# Altium PCB nrf24l01_cell(P40).PcbDoc (part 3 of 11)
Units mm, origin at the board's own origin, x right, y up, seen from the top; angles counter-clockwise.
Board outline 136.2 x 112.2 mm, 2 copper layers (TopLayer, BottomLayer); 520 components, 0 nets, 2804 pads, 1040 vias.
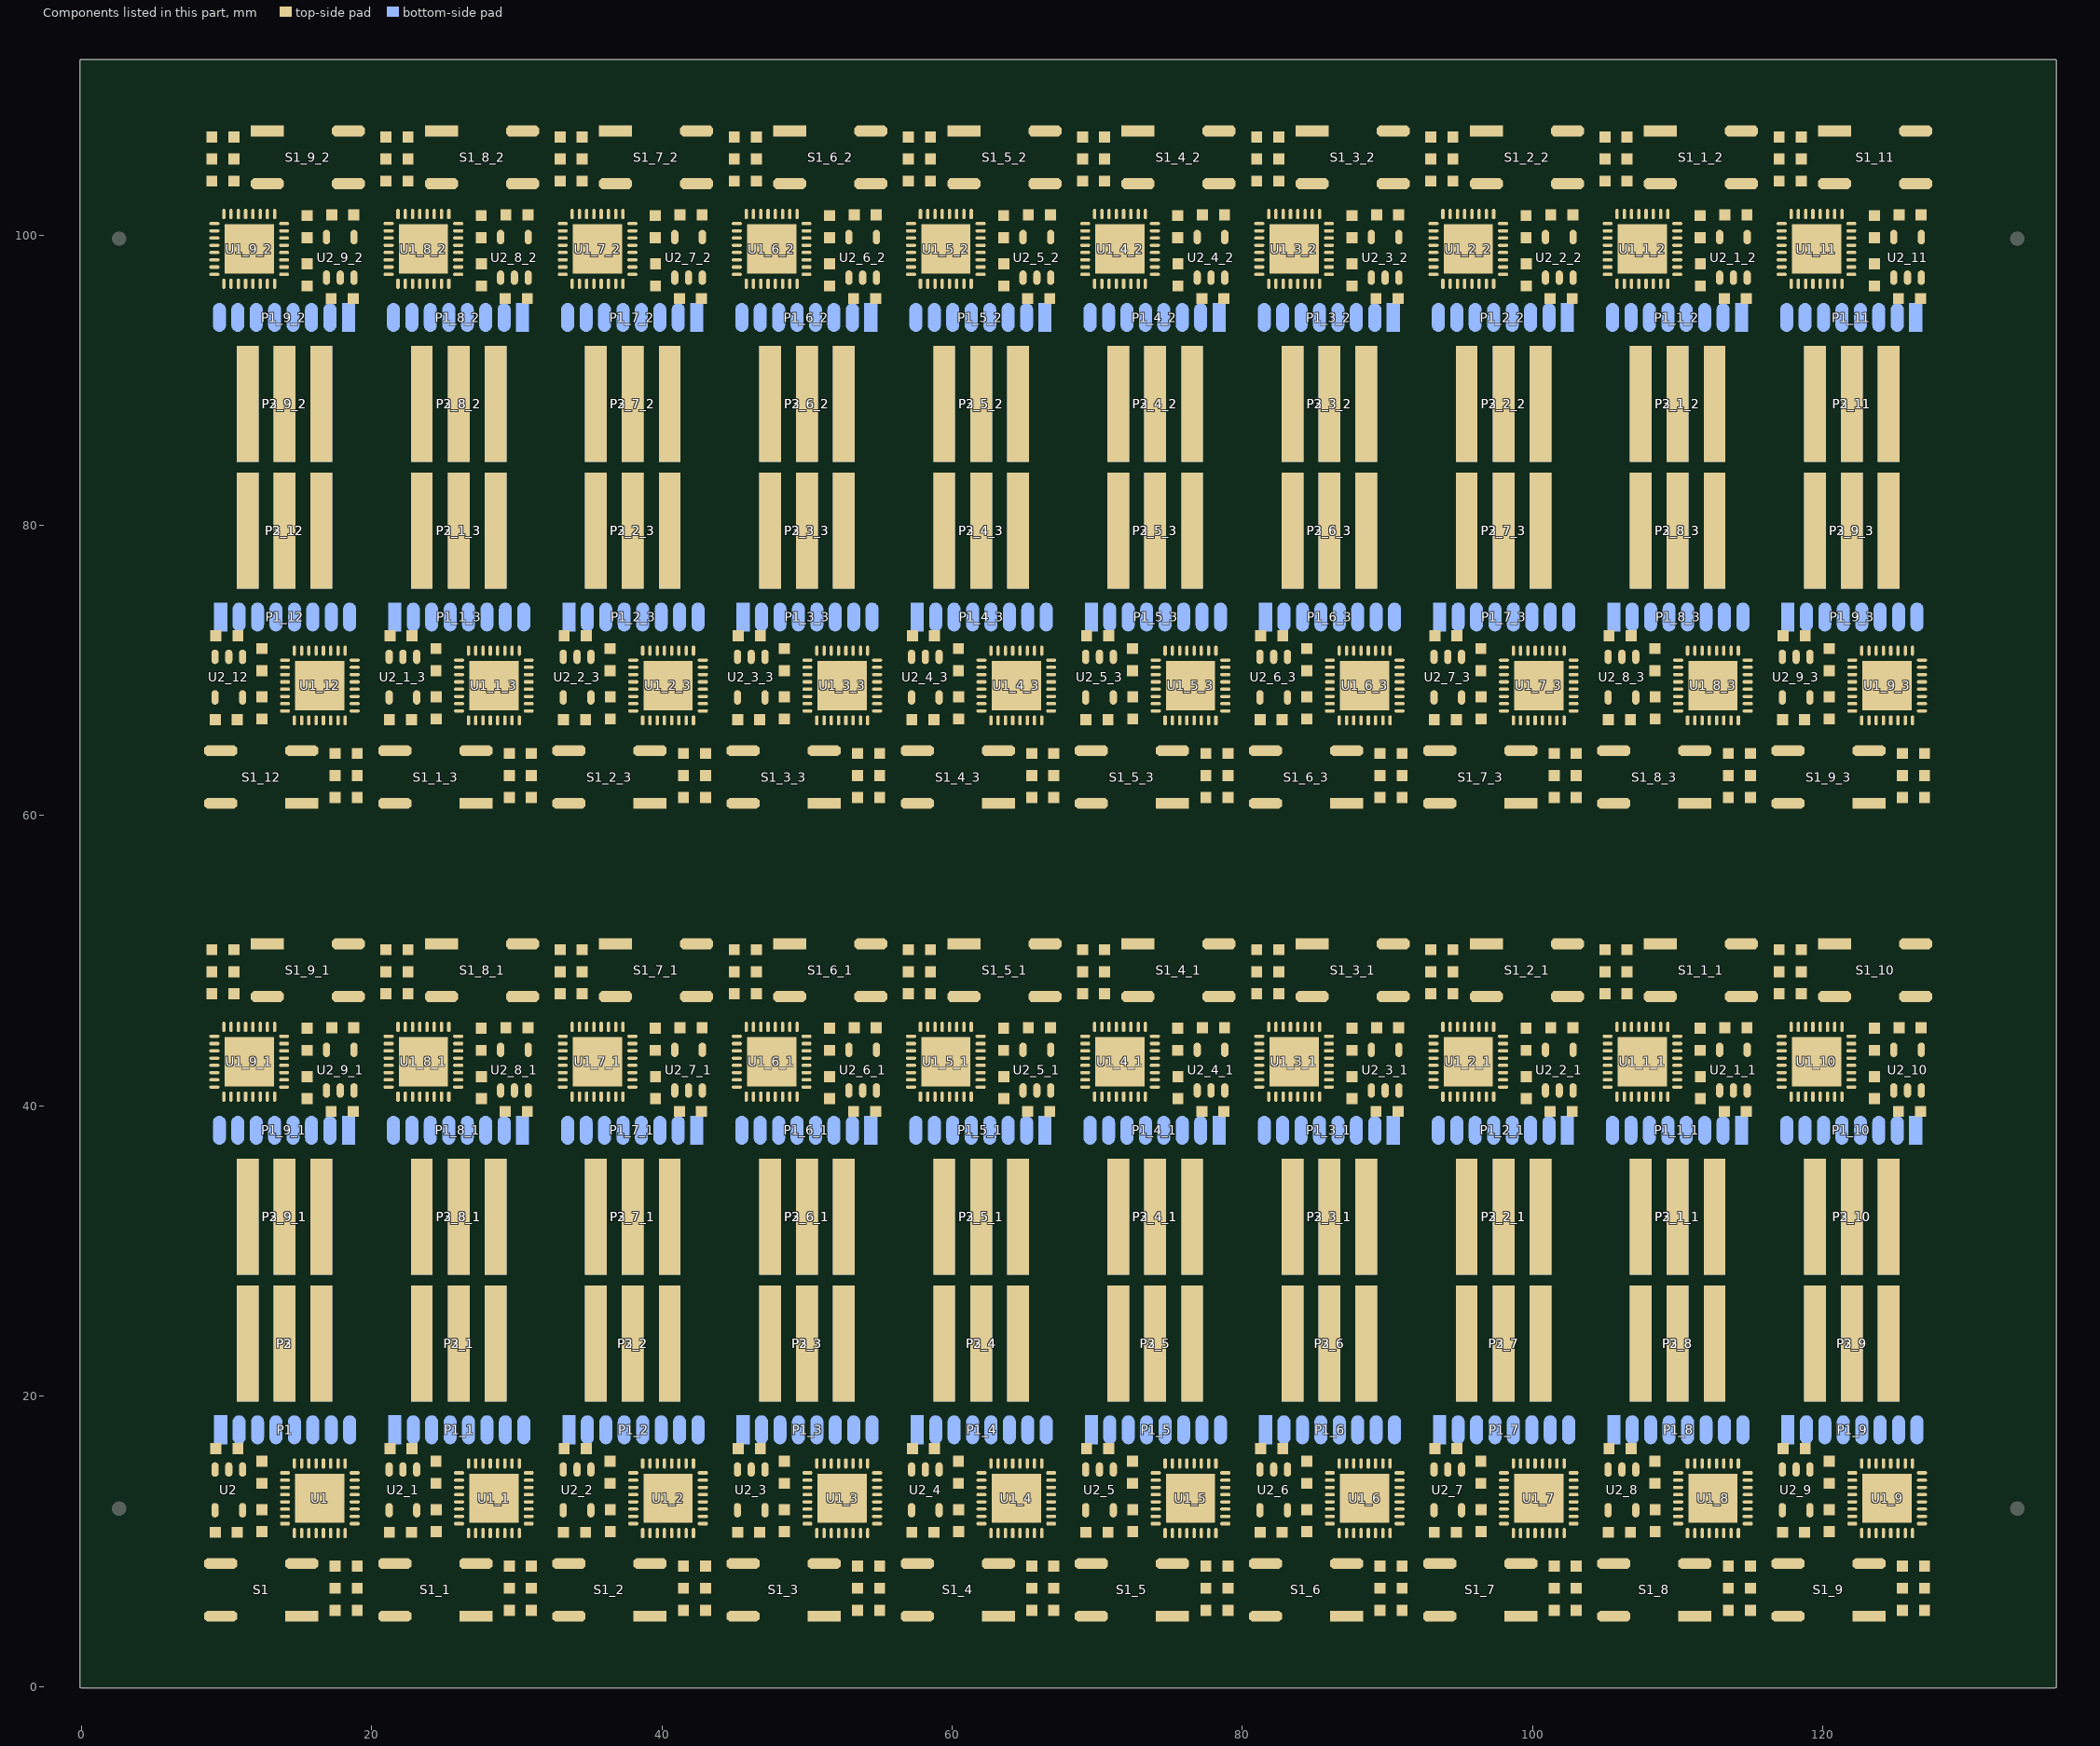
[diagram p3: the components of this part, seen from the top]

## Via types
v1: diameter 0.4, hole 0.2, TopLayer to BottomLayer, tented both sides, 1040 vias

## Nets (pads, with @x,y where several pads share a name; then routed paths per layer and width w, separated by ;. In a path a pad name is that pad's centre, name@x,y a point inside that pad or via, vN(x,y) a via of type N, cw(c..) or ccw(c..) an arc to the next point about the centre after c; other vN are vias at no path point) (continued)
copper on no net: (continued)
  TopLayer w0.203: v1@8.48,43.79 v1(8.55,43.79) 9.17,43.79 ; v1@8.48,99.79 v1(8.55,99.79) 9.17,99.79 ; v1(8.55,38.08) 9.21,38.08 11.46,35.83 ; v1(8.55,94.08) 9.21,94.08 11.46,91.83 ; v1@8.62,38.01 cw(c8.788,37.842) 8.788,38.08 cw(c8.788,38.318) v1@8.62,38.15 ; v1@8.62,43.72 cw(c8.788,43.552) 8.788,43.79 cw(c8.788,44.028) v1@8.62,43.86 ; v1@8.62,94.01 cw(c8.788,93.842) 8.788,94.08 cw(c8.788,94.318) v1@8.62,94.15 ; v1@8.62,99.72 cw(c8.788,99.552) 8.788,99.79 cw(c8.788,100.028) v1@8.62,99.86 ; v1(8.69,17.93) 11.46,20.7 ; v1@8.69,18.028 ccw(c8.69,18.266) 8.858,18.098 ccw(c9.026,17.93) v1@8.788,17.93 ; v1(8.69,73.93) 11.46,76.7 ; v1@8.69,74.028 ccw(c8.69,74.266) 8.858,74.098 ccw(c9.026,73.93) v1@8.788,73.93 ; 8.792,47.522 cw(c8.315,47.045) 8.99,47.045 cw(c9.665,47.045) 9.188,47.522 ; 8.792,103.522 cw(c8.315,103.045) 8.99,103.045 cw(c9.665,103.045) 9.188,103.522 ; 8.99,45.924 cw(c9.296,45.924) v1@9.08,46.14 ; 8.99,46.496 ccw(c9.296,46.496) v1@9.08,46.28 ; 8.99,47.72 8.99,45.66 9.17,45.48 9.17,44.79 ; 8.99,101.924 cw(c9.296,101.924) v1@9.08,102.14 ; 8.99,102.496 ccw(c9.296,102.496) v1@9.08,102.28 ; 8.99,103.72 8.99,101.66 9.17,101.48 9.17,100.79 ; 9.068,16.182 cw(c8.591,15.705) 9.266,15.705 cw(c9.941,15.705) 9.464,16.182 ; 9.068,16.578 ccw(c8.591,17.055) 9.266,17.055 ccw(c9.941,17.055) 9.464,16.578 ; 9.068,72.182 cw(c8.591,71.705) 9.266,71.705 cw(c9.941,71.705) 9.464,72.182 ; 9.068,72.578 ccw(c8.591,73.055) 9.266,73.055 ccw(c9.941,73.055) 9.464,72.578 ; 9.105,14.585 cw(c8.852,14.332) 9.21,14.332 cw(c9.568,14.332) 9.315,14.585 ; 9.105,15.295 ccw(c8.717,15.683) 9.266,15.683 ; 9.105,70.585 cw(c8.852,70.332) 9.21,70.332 cw(c9.568,70.332) 9.315,70.585 ; 9.105,71.295 ccw(c8.717,71.683) 9.266,71.683 ; 9.17,41.29 9.17,39.497 11.52,37.146 12.488,37.146 12.96,36.675 15.165,36.675 v1(15.21,36.63) ; 9.17,41.79 8.69,41.79 8.48,41.58 8.48,39.612 11.352,36.74 12.32,36.74 14,35.06 14,32.37 ; 9.17,97.29 9.17,95.497 11.52,93.146 12.488,93.146 12.96,92.675 15.165,92.675 v1(15.21,92.63) ; 9.17,97.79 8.69,97.79 8.48,97.58 8.48,95.612 11.352,92.74 12.32,92.74 14,91.06 14,88.37 ; 9.807,19.047 cw(c11.46,17.394) 11.46,19.732 ; 9.807,75.047 cw(c11.46,73.394) 11.46,75.732 ; 9.82,40.64 9.82,39.421 11.689,37.553 15.09,37.553 15.283,37.36 v1@15.81,37.36 ; 9.82,96.64 9.82,95.421 11.689,93.553 15.09,93.553 15.283,93.36 v1@15.81,93.36 ; 10.154,19.394 cw(c11.46,18.087) 11.46,19.935 ; 10.154,75.394 cw(c11.46,74.087) 11.46,75.935 ; 10.205,37.085 cw(c8.739,35.62) 10.812,35.62 ; 10.205,93.085 cw(c8.739,91.62) 10.812,91.62 ; 10.231,49.24 cw(c9.556,49.24) 10.033,48.763 cw(c10.51,48.286) 10.51,48.961 ; 10.231,105.24 cw(c9.556,105.24) 10.033,104.763 cw(c10.51,104.286) 10.51,104.961 ; 10.32,40.64 10.32,39.496 11.841,37.975 13.995,37.975 14.08,38.06 v1(14.57,38.06) ; 10.32,45.44 10.32,46.31 9.79,46.84 9.79,48.52 10.51,49.24 ; 10.32,96.64 10.32,95.496 11.841,93.975 13.995,93.975 14.08,94.06 v1(14.57,94.06) ; 10.32,101.44 10.32,102.31 9.79,102.84 9.79,104.52 10.51,105.24 ; 10.501,19.741 cw(c11.46,18.781) 11.46,20.138 ; 10.501,75.741 cw(c11.46,74.781) 11.46,76.138 ; 10.514,47.72 12.62,47.72 ; 10.514,103.72 12.62,103.72 ; 10.552,36.738 cw(c9.433,35.62) 11.015,35.62 ; 10.552,92.738 cw(c9.433,91.62) 11.015,91.62 ; 10.579,19.819 ccw(c10.019,20.38) 10.812,20.38 ; 10.579,75.819 ccw(c10.019,76.38) 10.812,76.38 ; 10.659,10.884 ccw(c10.443,11.516) 11.11,11.516 ; 10.659,66.884 ccw(c10.443,67.516) 11.11,67.516 ; 10.712,36.578 ccw(c11.46,37.327) 11.46,36.268 ; 10.712,47.522 cw(c11.189,47.045) 11.189,47.72 cw(c11.189,48.395) 10.712,47.918 ; 10.712,92.578 ccw(c11.46,93.327) 11.46,92.268 ; 10.712,103.522 cw(c11.189,103.045) 11.189,103.72 cw(c11.189,104.395) 10.712,103.918 ; 10.725,10.692 ccw(c10.54,11.231) 11.11,11.231 ; 10.725,66.692 ccw(c10.54,67.231) 11.11,67.231 ; 10.75,10.62 11.11,10.98 11.11,11.44 ; 10.75,66.62 11.11,66.98 11.11,67.44 ; 10.791,10.5 ccw(c10.638,10.946) 11.11,10.946 ; 10.791,66.5 ccw(c10.638,66.946) 11.11,66.946 ; 10.82,40.64 10.82,39.71 v1(12.05,38.48) ; 10.82,96.64 10.82,95.71 v1(12.05,94.48) ; v1@10.86,18.532 cw(c10.86,18.294) 11.028,18.462 cw(c11.196,18.63) v1@10.958,18.63 ; v1(10.86,18.63) 12.07,17.42 14.076,17.42 14.481,17.015 15.09,17.015 16.18,15.925 16.18,15.36 ; v1@10.86,74.532 cw(c10.86,74.294) 11.028,74.462 cw(c11.196,74.63) v1@10.958,74.63 ; v1(10.86,74.63) 12.07,73.42 14.076,73.42 14.481,73.015 15.09,73.015 16.18,71.925 16.18,71.36 ; 10.898,36.392 cw(c10.127,35.62) 11.218,35.62 ; 10.898,92.392 cw(c10.127,91.62) 11.218,91.62 ; 10.916,47.72 cw(c10.916,46.398) 11.85,47.333 ; 10.916,103.72 cw(c10.916,102.398) 11.85,103.333 ; 11.005,11.785 cw(c10.752,11.532) 11.11,11.532 cw(c11.468,11.532) 11.215,11.785 ; 11.005,14.585 cw(c10.752,14.332) 11.11,14.332 cw(c11.468,14.332) 11.215,14.585 ; 11.005,67.785 cw(c10.752,67.532) 11.11,67.532 cw(c11.468,67.532) 11.215,67.785 ; 11.005,70.585 cw(c10.752,70.332) 11.11,70.332 cw(c11.468,70.332) 11.215,70.585 ; 11.11,12.14 11.11,11.44 ; 11.11,14.94 11.11,14.14 10.94,13.97 9.4,13.97 9.21,14.16 9.21,14.94 9.266,14.996 9.266,16.38 9.266,17.75 10.578,19.062 10.656,19.14 v1(11.46,19.14) ; 11.11,68.14 11.11,67.44 ; 11.11,70.94 11.11,70.14 10.94,69.97 9.4,69.97 9.21,70.16 9.21,70.94 9.266,70.996 9.266,72.38 9.266,73.75 10.578,75.062 10.656,75.14 v1(11.46,75.14) ; 11.32,40.64 11.32,40 12.335,38.985 12.84,38.48 v1(13.31,38.48) ; 11.32,96.64 11.32,96 12.335,94.985 12.84,94.48 v1(13.31,94.48) ; v1@11.39,19.07 ccw(c11.222,18.902) 11.222,19.14 ccw(c11.222,19.378) v1@11.39,19.21 ; v1@11.39,75.07 ccw(c11.222,74.902) 11.222,75.14 ccw(c11.222,75.378) v1@11.39,75.21 ; 11.407,47.72 cw(c11.407,46.889) 11.994,47.477 ; 11.407,103.72 cw(c11.407,102.889) 11.994,103.477 ; 11.82,40.64 11.82,40.075 12.91,38.985 13.519,38.985 13.924,38.58 15.93,38.58 v1(17.14,37.37) ; 11.82,96.64 11.82,96.075 12.91,94.985 13.519,94.985 13.924,94.58 15.93,94.58 v1(17.14,93.37) ; v1@11.952,38.48 ccw(c11.714,38.48) 11.882,38.648 ccw(c12.05,38.816) v1@12.05,38.578 ; v1@11.952,94.48 ccw(c11.714,94.48) 11.882,94.648 ccw(c12.05,94.816) v1@12.05,94.578 ; v1@12.11,18.72 v1@12.19,18.64 ; v1@12.11,74.72 v1@12.19,74.64 ; v1(12.12,18.64) v1@12.19,18.64 ; v1(12.12,74.64) v1@12.19,74.64 ; v1@12.19,18.57 cw(c12.358,18.402) 12.358,18.64 cw(c12.358,18.878) v1@12.19,18.71 ; v1@12.19,74.57 cw(c12.358,74.402) 12.358,74.64 cw(c12.358,74.878) v1@12.19,74.71 ; 12.256,12.381 ccw(c11.81,12.84) 12.45,12.84 ; 12.256,68.381 ccw(c11.81,68.84) 12.45,68.84 ; 12.44,15.41 13.2,16.17 14.786,16.17 15.18,15.776 15.18,15.36 ; 12.44,15.789 ccw(c12.44,16.705) 13.088,16.058 ; 12.44,71.41 13.2,72.17 14.786,72.17 15.18,71.776 15.18,71.36 ; 12.44,71.789 ccw(c12.44,72.705) 13.088,72.058 ; 12.45,12.18 12.45,12.84 ; 12.45,68.18 12.45,68.84 ; 12.644,12.381 cw(c13.09,12.84) 12.45,12.84 ; 12.644,68.381 cw(c13.09,68.84) 12.45,68.84 ; 12.719,15.51 cw(c13.153,15.51) 12.846,15.816 ; 12.719,71.51 cw(c13.153,71.51) 12.846,71.816 ; v1(12.79,19.37) 12.835,19.325 15.04,19.325 15.512,18.854 16.48,18.854 18.83,16.503 18.83,14.71 ; v1(12.79,75.37) 12.835,75.325 15.04,75.325 15.512,74.854 16.48,74.854 18.83,72.503 18.83,70.71 ; 12.82,40.64 12.82,40.224 13.214,39.83 14.8,39.83 15.56,40.59 ; 12.82,96.64 12.82,96.224 13.214,95.83 14.8,95.83 15.56,96.59 ; 12.833,40.405 ccw(c13.302,40.405) 12.971,40.073 ; 12.833,96.405 ccw(c13.302,96.405) 12.971,96.073 ; v1@12.86,19.44 ccw(c13.136,19.716) 13.136,19.325 ; v1@12.86,75.44 ccw(c13.136,75.716) 13.136,75.325 ; v1@13.18,14.01 ccw(c13.012,14.178) 13.25,14.178 ccw(c13.488,14.178) v1@13.32,14.01 ; v1@13.18,70.01 ccw(c13.012,70.178) 13.25,70.178 ccw(c13.488,70.178) v1@13.32,70.01 ; v1@13.195,12.564 cw(c13.545,12.219) 13.545,12.71 ; v1@13.195,68.564 cw(c13.545,68.219) 13.545,68.71 ; v1@13.2,12.42 cw(c13.057,12.277) 13.26,12.277 ; v1@13.2,68.42 cw(c13.057,68.277) 13.26,68.277 ; v1@13.24,38.41 ccw(c13.072,38.242) 13.072,38.48 ccw(c13.072,38.718) v1@13.24,38.55 ; v1@13.24,94.41 ccw(c13.072,94.242) 13.072,94.48 ccw(c13.072,94.718) v1@13.24,94.55 ; v1(13.25,13.94) 13.25,14.55 13.41,14.71 14.03,14.71 ; v1(13.25,69.94) 13.25,70.55 13.41,70.71 14.03,70.71 ; 13.26,12.228 cw(c13.532,12.228) v1@13.34,12.42 ; v1@13.26,12.49 13.26,11.59 13.11,11.44 11.11,11.44 ; v1@13.26,12.53 13.44,12.71 14.03,12.71 ccw(c14.03,11.742) v1@13.34,12.421 ; 13.26,68.228 cw(c13.532,68.228) 13.34,68.42 cw(c14.03,67.742) 14.03,68.71 13.44,68.71 v1@13.26,68.53 ; v1@13.26,68.49 13.26,67.59 13.11,67.44 11.11,67.44 ; v1@13.366,12.512 cw(c13.545,12.555) 13.415,12.685 ; v1@13.366,68.512 cw(c13.545,68.555) 13.415,68.685 ; v1(13.43,17.94) 13.92,17.94 14.005,18.025 16.159,18.025 17.68,16.504 17.68,15.36 ; v1(13.43,73.94) 13.92,73.94 14.005,74.025 16.159,74.025 17.68,72.504 17.68,71.36 ; v1@13.5,17.87 cw(c13.668,17.702) 13.668,17.94 cw(c13.668,18.178) v1@13.5,18.01 ; v1@13.5,73.87 cw(c13.668,73.702) 13.668,73.94 cw(c13.668,74.178) v1@13.5,74.01 ; v1@13.9,45.21 cw(c13.732,45.042) 13.97,45.042 cw(c14.208,45.042) v1@14.04,45.21 ; v1@13.9,101.21 cw(c13.732,101.042) 13.97,101.042 cw(c14.208,101.042) v1@14.04,101.21 ; v1@13.96,10.79 ccw(c13.792,10.958) 14.03,10.958 ccw(c14.268,10.958) v1@14.1,10.79 ; v1@13.96,66.79 ccw(c13.792,66.958) 14.03,66.958 ccw(c14.268,66.958) v1@14.1,66.79 ; 13.97,41.29 14.59,41.29 14.75,41.45 v1(14.75,42.06) ; 13.97,42.79 15.18,42.79 15.55,43.16 ; 13.97,44.79 v1(13.97,45.28) ; 13.97,97.29 14.59,97.29 14.75,97.45 v1(14.75,98.06) ; 13.97,98.79 15.18,98.79 15.55,99.16 ; 13.97,100.79 v1(13.97,101.28) ; 14,23.63 14,20.94 15.68,19.26 16.648,19.26 19.52,16.388 19.52,14.42 19.31,14.21 18.83,14.21 ; 14,79.63 14,76.94 15.68,75.26 16.648,75.26 19.52,72.388 19.52,70.42 19.31,70.21 18.83,70.21 ; v1(14.03,10.72) 14.03,11.21 ; 14.03,13.21 12.82,13.21 12.45,12.84 ; v1(14.03,66.72) 14.03,67.21 ; 14.03,69.21 12.82,69.21 12.45,68.84 ; 14.455,43.29 ccw(c14.455,43.781) v1@14.805,43.436 ; 14.455,99.29 ccw(c14.455,99.781) v1@14.805,99.436 ; v1@14.5,37.99 ccw(c14.332,37.822) 14.332,38.06 ccw(c14.332,38.298) v1@14.5,38.13 ; v1@14.5,93.99 ccw(c14.332,93.822) 14.332,94.06 ccw(c14.332,94.298) v1@14.5,94.13 ; 14.585,43.315 ccw(c14.455,43.445) v1@14.634,43.488 ; 14.585,99.315 ccw(c14.455,99.445) v1@14.634,99.488 ; v1@14.66,43.579 cw(c13.97,44.258) 13.97,43.29 14.56,43.29 v1@14.74,43.47 ; v1@14.66,99.579 cw(c13.97,100.258) 13.97,99.29 14.56,99.29 v1@14.74,99.47 ; v1@14.66,43.58 ccw(c14.468,43.772) 14.74,43.772 ; v1@14.66,99.58 ccw(c14.468,99.772) 14.74,99.772 ; v1@14.68,41.99 cw(c14.512,41.822) 14.75,41.822 cw(c14.988,41.822) v1@14.82,41.99 ; v1@14.68,97.99 cw(c14.512,97.822) 14.75,97.822 cw(c14.988,97.822) v1@14.82,97.99 ; v1(14.69,17.52) 15.16,17.52 15.665,17.015 16.68,16 16.68,15.36 ; v1(14.69,73.52) 15.16,73.52 15.665,73.015 16.68,72 16.68,71.36 ; v1@14.74,43.51 14.74,44.41 14.89,44.56 16.89,44.56 ; 14.74,43.723 ccw(c14.943,43.723) v1@14.8,43.58 ; v1@14.74,99.51 14.74,100.41 14.89,100.56 16.89,100.56 ; 14.74,99.723 ccw(c14.943,99.723) v1@14.8,99.58 ; v1@14.76,17.45 cw(c14.928,17.282) 14.928,17.52 cw(c14.928,17.758) v1@14.76,17.59 ; v1@14.76,73.45 cw(c14.928,73.282) 14.928,73.52 cw(c14.928,73.758) v1@14.76,73.59 ; 14.864,36.675 cw(c14.864,36.284) v1@15.14,36.56 ; 14.864,92.675 cw(c14.864,92.284) v1@15.14,92.56 ; 14.912,39.942 cw(c15.56,39.295) 15.56,40.211 ; 14.912,95.942 cw(c15.56,95.295) 15.56,96.211 ; 15.029,15.927 cw(c14.698,15.595) 15.167,15.595 ; 15.029,71.927 cw(c14.698,71.595) 15.167,71.595 ; 15.154,40.184 ccw(c14.847,40.49) 15.281,40.49 ; 15.154,96.184 ccw(c14.847,96.49) 15.281,96.49 ; 15.356,43.619 cw(c14.91,43.16) 15.55,43.16 ; 15.356,99.619 cw(c14.91,99.16) 15.55,99.16 ; 15.38,8.28 17.486,8.28 ; 15.379,64.28 17.486,64.28 ; 15.55,43.82 15.55,43.16 ; 15.55,99.82 15.55,99.16 ; 15.744,43.619 ccw(c16.19,43.16) 15.55,43.16 ; 15.744,99.619 ccw(c16.19,99.16) 15.55,99.16 ; v1@15.81,37.29 ccw(c15.642,37.122) 15.642,37.36 ccw(c15.642,37.598) v1@15.81,37.43 ; v1@15.81,93.29 ccw(c15.642,93.122) 15.642,93.36 ccw(c15.642,93.598) v1@15.81,93.43 ; v1(15.88,37.36) v1@15.81,37.36 ; v1(15.88,93.36) v1@15.81,93.36 ; v1@15.89,37.28 v1@15.81,37.36 ; v1@15.89,93.28 v1@15.81,93.36 ; v1@15.95,17.422 cw(c15.95,17.184) 16.118,17.352 cw(c16.286,17.52) v1@16.048,17.52 ; v1(15.95,17.52) 17.18,16.29 17.18,15.36 ; v1@15.95,73.422 cw(c15.95,73.184) 16.118,73.352 cw(c16.286,73.52) v1@16.048,73.52 ; v1(15.95,73.52) 17.18,72.29 17.18,71.36 ; 16.006,8.523 ccw(c16.593,9.111) 16.593,8.28 ; 16.006,64.523 ccw(c16.593,65.111) 16.593,64.28 ; 16.15,8.667 ccw(c17.084,9.602) 17.084,8.28 ; 16.15,64.667 ccw(c17.084,65.602) 17.084,64.28 ; 16.54,19.732 cw(c16.54,18.673) 17.288,19.422 ; 16.54,20.17 18.79,17.92 v1(19.45,17.92) ; 16.54,35.3 v1(19.31,38.07) ; 16.54,35.862 ccw(c16.54,37.219) 17.499,36.259 ; 16.54,36.065 ccw(c16.54,37.913) 17.846,36.606 ; 16.54,36.268 ccw(c16.54,38.606) 18.193,36.953 ; v1(16.54,36.86) 17.344,36.86 17.422,36.938 18.734,38.25 18.734,39.62 18.734,41.004 18.79,41.06 18.79,41.84 18.6,42.03 17.06,42.03 16.89,41.86 16.89,41.06 ; 16.54,75.732 cw(c16.54,74.673) 17.288,75.422 ; 16.54,76.17 18.79,73.92 v1(19.45,73.92) ; 16.54,91.3 v1(19.31,94.07) ; 16.54,91.862 ccw(c16.54,93.219) 17.499,92.259 ; 16.54,92.065 ccw(c16.54,93.913) 17.846,92.606 ; 16.54,92.268 ccw(c16.54,94.606) 18.193,92.953 ; v1(16.54,92.86) 17.344,92.86 17.422,92.938 18.734,94.25 18.734,95.62 18.734,97.004 18.79,97.06 18.79,97.84 18.6,98.03 17.06,98.03 16.89,97.86 16.89,97.06 ; v1@16.61,36.79 cw(c16.778,36.622) 16.778,36.86 cw(c16.778,37.098) v1@16.61,36.93 ; v1@16.61,92.79 cw(c16.778,92.622) 16.778,92.86 cw(c16.778,93.098) v1@16.61,92.93 ; 16.782,20.38 ccw(c17.873,20.38) 17.102,19.608 ; 16.782,76.38 ccw(c17.873,76.38) 17.102,75.608 ; 16.785,41.415 ccw(c16.532,41.668) 16.89,41.668 ccw(c17.248,41.668) 16.995,41.415 ; 16.785,44.215 ccw(c16.532,44.468) 16.89,44.468 ccw(c17.248,44.468) 16.995,44.215 ; 16.785,97.415 ccw(c16.532,97.668) 16.89,97.668 ccw(c17.248,97.668) 16.995,97.415 ; 16.785,100.215 ccw(c16.532,100.468) 16.89,100.468 ccw(c17.248,100.468) 16.995,100.215 ; 16.89,43.86 16.89,44.56 ; 16.89,44.484 cw(c17.557,44.484) 17.341,45.116 ; 16.89,44.769 cw(c17.46,44.769) 17.275,45.308 ; 16.89,45.054 cw(c17.362,45.054) 17.209,45.5 ; 16.89,99.86 16.89,100.56 ; 16.89,100.484 cw(c17.557,100.484) 17.341,101.116 ; 16.89,100.769 cw(c17.46,100.769) 17.275,101.308 ; 16.89,101.054 cw(c17.362,101.054) 17.209,101.5 ; 16.985,20.38 ccw(c18.567,20.38) 17.448,19.262 ; 16.985,76.38 ccw(c18.567,76.38) 17.448,75.262 ; v1@17.042,37.37 ccw(c16.804,37.37) 16.972,37.538 ccw(c17.14,37.706) v1@17.14,37.468 ; v1@17.042,93.37 ccw(c16.804,93.37) 16.972,93.538 ccw(c17.14,93.706) v1@17.14,93.468 ; 17.188,20.38 ccw(c19.261,20.38) 17.795,18.915 ; 17.188,35.62 cw(c17.981,35.62) 17.421,36.181 ; 17.188,76.38 ccw(c19.261,76.38) 17.795,74.915 ; 17.188,91.62 cw(c17.981,91.62) 17.421,92.181 ; 17.25,45.38 16.89,45.02 16.89,44.56 ; 17.25,101.38 16.89,101.02 16.89,100.56 ; 17.288,8.082 ccw(c16.811,7.605) 16.811,8.28 ccw(c16.811,8.955) 17.288,8.478 ; 17.288,64.082 ccw(c16.811,63.605) 16.811,64.28 ccw(c16.811,64.955) 17.288,64.478 ; 17.49,6.76 18.21,7.48 18.21,9.16 17.68,9.69 17.68,10.56 ; 17.49,7.039 ccw(c17.49,7.714) 17.967,7.237 ccw(c18.444,6.76) 17.769,6.76 ; 17.49,62.76 18.21,63.48 18.21,65.16 17.68,65.69 17.68,66.56 ; 17.49,63.039 ccw(c17.49,63.714) 17.967,63.237 ccw(c18.444,62.76) 17.769,62.76 ; 18.18,15.36 18.18,16.579 16.311,18.447 12.91,18.447 12.717,18.64 v1@12.19,18.64 ; 18.18,71.36 18.18,72.579 16.311,74.447 12.91,74.447 12.717,74.64 v1@12.19,74.64 ; 18.536,39.422 cw(c18.059,38.945) 18.734,38.945 cw(c19.409,38.945) 18.932,39.422 ; 18.536,39.818 ccw(c18.059,40.295) 18.734,40.295 ccw(c19.409,40.295) 18.932,39.818 ; 18.536,95.422 cw(c18.059,94.945) 18.734,94.945 cw(c19.409,94.945) 18.932,95.422 ; 18.536,95.818 ccw(c18.059,96.295) 18.734,96.295 ccw(c19.409,96.295) 18.932,95.818 ; 18.685,41.415 ccw(c18.432,41.668) 18.79,41.668 ccw(c19.148,41.668) 18.895,41.415 ; 18.685,97.415 ccw(c18.432,97.668) 18.79,97.668 ccw(c19.148,97.668) 18.895,97.415 ; 18.734,40.317 cw(c19.283,40.317) 18.895,40.705 ; 18.734,96.317 cw(c19.283,96.317) 18.895,96.705 ; 18.812,8.478 ccw(c18.335,8.955) 19.01,8.955 ccw(c19.685,8.955) 19.208,8.478 ; 18.812,64.478 ccw(c18.335,64.955) 19.01,64.955 ccw(c19.685,64.955) 19.208,64.478 ; 18.83,11.21 18.83,10.52 19.01,10.34 19.01,8.28 ; 18.83,12.21 v1(19.45,12.21) v1@19.52,12.21 ; 18.83,67.21 18.83,66.52 19.01,66.34 19.01,64.28 ; 18.83,68.21 v1(19.45,68.21) v1@19.52,68.21 ; v1@18.92,9.72 cw(c18.704,9.504) 19.01,9.504 ; v1@18.92,9.86 ccw(c18.704,10.076) 19.01,10.076 ; v1@18.92,65.72 cw(c18.704,65.504) 19.01,65.504 ; v1@18.92,65.86 ccw(c18.704,66.076) 19.01,66.076 ; v1@19.212,38.07 cw(c18.974,38.07) 19.142,37.902 cw(c19.31,37.734) v1@19.31,37.972 ; v1@19.212,94.07 cw(c18.974,94.07) 19.142,93.902 cw(c19.31,93.734) v1@19.31,93.972 ; v1@19.38,12.14 ccw(c19.212,11.972) 19.212,12.21 ccw(c19.212,12.448) v1@19.38,12.28 ; v1@19.38,17.85 ccw(c19.212,17.682) 19.212,17.92 ccw(c19.212,18.158) v1@19.38,17.99 ; v1@19.38,68.14 ccw(c19.212,67.972) 19.212,68.21 ccw(c19.212,68.448) v1@19.38,68.28 ; v1@19.38,73.85 ccw(c19.212,73.682) 19.212,73.92 ccw(c19.212,74.158) v1@19.38,73.99 ; v1@20.48,43.79 v1(20.55,43.79) 21.17,43.79 ; v1@20.48,99.79 v1(20.55,99.79) 21.17,99.79 ; v1(20.55,38.08) 21.21,38.08 23.46,35.83 ; v1(20.55,94.08) 21.21,94.08 23.46,91.83 ; v1@20.62,38.01 cw(c20.788,37.842) 20.788,38.08 cw(c20.788,38.318) v1@20.62,38.15 ; v1@20.62,43.72 cw(c20.788,43.552) 20.788,43.79 cw(c20.788,44.028) v1@20.62,43.86 ; v1@20.62,94.01 cw(c20.788,93.842) 20.788,94.08 cw(c20.788,94.318) v1@20.62,94.15 ; v1@20.62,99.72 cw(c20.788,99.552) 20.788,99.79 cw(c20.788,100.028) v1@20.62,99.86 ; v1(20.69,17.93) 23.46,20.7 ; v1@20.69,18.028 ccw(c20.69,18.266) 20.858,18.098 ccw(c21.026,17.93) v1@20.788,17.93 ; v1(20.69,73.93) 23.46,76.7 ; v1@20.69,74.028 ccw(c20.69,74.266) 20.858,74.098 ccw(c21.026,73.93) v1@20.788,73.93 ; 20.792,47.522 cw(c20.315,47.045) 20.99,47.045 cw(c21.665,47.045) 21.188,47.522 ; 20.792,103.522 cw(c20.315,103.045) 20.99,103.045 cw(c21.665,103.045) 21.188,103.522 ; 20.99,45.924 cw(c21.296,45.924) v1@21.08,46.14 ; 20.99,46.496 ccw(c21.296,46.496) v1@21.08,46.28 ; 20.99,47.72 20.99,45.66 21.17,45.48 21.17,44.79 ; 20.99,101.924 cw(c21.296,101.924) v1@21.08,102.14 ; 20.99,102.496 ccw(c21.296,102.496) v1@21.08,102.28 ; 20.99,103.72 20.99,101.66 21.17,101.48 21.17,100.79 ; 21.068,16.182 cw(c20.591,15.705) 21.266,15.705 cw(c21.941,15.705) 21.464,16.182 ; 21.068,16.578 ccw(c20.591,17.055) 21.266,17.055 ccw(c21.941,17.055) 21.464,16.578 ; 21.068,72.182 cw(c20.591,71.705) 21.266,71.705 cw(c21.941,71.705) 21.464,72.182 ; 21.068,72.578 ccw(c20.591,73.055) 21.266,73.055 ccw(c21.941,73.055) 21.464,72.578 ; 21.105,14.585 cw(c20.852,14.332) 21.21,14.332 cw(c21.568,14.332) 21.315,14.585 ; 21.105,15.295 ccw(c20.717,15.683) 21.266,15.683 ; 21.105,70.585 cw(c20.852,70.332) 21.21,70.332 cw(c21.568,70.332) 21.315,70.585 ; 21.105,71.295 ccw(c20.717,71.683) 21.266,71.683 ; 21.17,41.29 21.17,39.497 23.52,37.146 24.488,37.146 24.96,36.675 27.165,36.675 v1(27.21,36.63) ; 21.17,41.79 20.69,41.79 20.48,41.58 20.48,39.612 23.352,36.74 24.32,36.74 26,35.06 26,32.37 ; 21.17,97.29 21.17,95.497 23.52,93.146 24.488,93.146 24.96,92.675 27.165,92.675 v1(27.21,92.63) ; 21.17,97.79 20.69,97.79 20.48,97.58 20.48,95.612 23.352,92.74 24.32,92.74 26,91.06 26,88.37 ; 21.807,19.047 cw(c23.46,17.394) 23.46,19.732 ; 21.807,75.047 cw(c23.46,73.394) 23.46,75.732 ; 21.82,40.64 21.82,39.421 23.689,37.553 27.09,37.553 27.283,37.36 v1@27.81,37.36 ; 21.82,96.64 21.82,95.421 23.689,93.553 27.09,93.553 27.283,93.36 v1@27.81,93.36 ; 22.154,19.394 cw(c23.46,18.087) 23.46,19.935 ; 22.154,75.394 cw(c23.46,74.087) 23.46,75.935 ; 22.205,37.085 cw(c20.739,35.62) 22.812,35.62 ; 22.205,93.085 cw(c20.739,91.62) 22.812,91.62 ; 22.231,49.24 cw(c21.556,49.24) 22.033,48.763 cw(c22.51,48.286) 22.51,48.961 ; 22.231,105.24 cw(c21.556,105.24) 22.033,104.763 cw(c22.51,104.286) 22.51,104.961 ; 22.32,40.64 22.32,39.496 23.841,37.975 25.995,37.975 26.08,38.06 v1(26.57,38.06) ; 22.32,45.44 22.32,46.31 21.79,46.84 21.79,48.52 22.51,49.24 ; 22.32,96.64 22.32,95.496 23.841,93.975 25.995,93.975 26.08,94.06 v1(26.57,94.06) ; 22.32,101.44 22.32,102.31 21.79,102.84 21.79,104.52 22.51,105.24 ; 22.501,19.741 cw(c23.46,18.781) 23.46,20.138 ; 22.501,75.741 cw(c23.46,74.781) 23.46,76.138 ; 22.514,47.72 24.62,47.72 ; 22.514,103.72 24.62,103.72 ; 22.552,36.738 cw(c21.433,35.62) 23.015,35.62 ; 22.552,92.738 cw(c21.433,91.62) 23.015,91.62 ; 22.579,19.819 ccw(c22.019,20.38) 22.812,20.38 ; 22.579,75.819 ccw(c22.019,76.38) 22.812,76.38 ; 22.659,10.884 ccw(c22.443,11.516) 23.11,11.516 ; 22.659,66.884 ccw(c22.443,67.516) 23.11,67.516 ; 22.712,36.578 ccw(c23.46,37.327) 23.46,36.268 ; 22.712,47.522 cw(c23.189,47.045) 23.189,47.72 cw(c23.189,48.395) 22.712,47.918 ; 22.712,92.578 ccw(c23.46,93.327) 23.46,92.268 ; 22.712,103.522 cw(c23.189,103.045) 23.189,103.72 cw(c23.189,104.395) 22.712,103.918 ; 22.725,10.692 ccw(c22.54,11.231) 23.11,11.231 ; 22.725,66.692 ccw(c22.54,67.231) 23.11,67.231 ; 22.75,10.62 23.11,10.98 23.11,11.44 ; 22.75,66.62 23.11,66.98 23.11,67.44 ; 22.791,10.5 ccw(c22.638,10.946) 23.11,10.946 ; 22.791,66.5 ccw(c22.638,66.946) 23.11,66.946 ; 22.82,40.64 22.82,39.71 v1(24.05,38.48) ; 22.82,96.64 22.82,95.71 v1(24.05,94.48) ; v1@22.86,18.532 cw(c22.86,18.294) 23.028,18.462 cw(c23.196,18.63) v1@22.958,18.63 ; v1(22.86,18.63) 24.07,17.42 26.076,17.42 26.481,17.015 27.09,17.015 28.18,15.925 28.18,15.36 ; v1@22.86,74.532 cw(c22.86,74.294) 23.028,74.462 cw(c23.196,74.63) v1@22.958,74.63 ; v1(22.86,74.63) 24.07,73.42 26.076,73.42 26.481,73.015 27.09,73.015 28.18,71.925 28.18,71.36 ; 22.898,36.392 cw(c22.127,35.62) 23.218,35.62 ; 22.898,92.392 cw(c22.127,91.62) 23.218,91.62 ; 22.916,47.72 cw(c22.916,46.398) 23.85,47.333 ; 22.916,103.72 cw(c22.916,102.398) 23.85,103.333 ; 23.005,11.785 cw(c22.752,11.532) 23.11,11.532 cw(c23.468,11.532) 23.215,11.785 ; 23.005,14.585 cw(c22.752,14.332) 23.11,14.332 cw(c23.468,14.332) 23.215,14.585 ; 23.005,67.785 cw(c22.752,67.532) 23.11,67.532 cw(c23.468,67.532) 23.215,67.785 ; 23.005,70.585 cw(c22.752,70.332) 23.11,70.332 cw(c23.468,70.332) 23.215,70.585 ; 23.11,12.14 23.11,11.44 ; 23.11,14.94 23.11,14.14 22.94,13.97 21.4,13.97 21.21,14.16 21.21,14.94 21.266,14.996 21.266,16.38 21.266,17.75 22.578,19.062 22.656,19.14 v1(23.46,19.14) ; 23.11,68.14 23.11,67.44 ; 23.11,70.94 23.11,70.14 22.94,69.97 21.4,69.97 21.21,70.16 21.21,70.94 21.266,70.996 21.266,72.38 21.266,73.75 22.578,75.062 22.656,75.14 v1(23.46,75.14) ; 23.32,40.64 23.32,40 24.335,38.985 24.84,38.48 v1(25.31,38.48) ; 23.32,96.64 23.32,96 24.335,94.985 24.84,94.48 v1(25.31,94.48) ; v1@23.39,19.07 ccw(c23.222,18.902) 23.222,19.14 ccw(c23.222,19.378) v1@23.39,19.21 ; v1@23.39,75.07 ccw(c23.222,74.902) 23.222,75.14 ccw(c23.222,75.378) v1@23.39,75.21 ; 23.407,47.72 cw(c23.407,46.889) 23.994,47.477 ; 23.407,103.72 cw(c23.407,102.889) 23.994,103.477 ; 23.82,40.64 23.82,40.075 24.91,38.985 25.519,38.985 25.924,38.58 27.93,38.58 v1(29.14,37.37) ; 23.82,96.64 23.82,96.075 24.91,94.985 25.519,94.985 25.924,94.58 27.93,94.58 v1(29.14,93.37) ; v1@23.952,38.48 ccw(c23.714,38.48) 23.882,38.648 ccw(c24.05,38.816) v1@24.05,38.578 ; v1@23.952,94.48 ccw(c23.714,94.48) 23.882,94.648 ccw(c24.05,94.816) v1@24.05,94.578 ; v1@24.11,18.72 v1@24.19,18.64 ; v1@24.11,74.72 v1@24.19,74.64 ; v1(24.12,18.64) v1@24.19,18.64 ; v1(24.12,74.64) v1@24.19,74.64 ; v1@24.19,18.57 cw(c24.358,18.402) 24.358,18.64 cw(c24.358,18.878) v1@24.19,18.71 ; v1@24.19,74.57 cw(c24.358,74.402) 24.358,74.64 cw(c24.358,74.878) v1@24.19,74.71 ; 24.256,12.381 ccw(c23.81,12.84) 24.45,12.84 ; 24.256,68.381 ccw(c23.81,68.84) 24.45,68.84 ; 24.44,15.41 25.2,16.17 26.786,16.17 27.18,15.776 27.18,15.36 ; 24.44,15.789 ccw(c24.44,16.705) 25.088,16.058 ; 24.44,71.41 25.2,72.17 26.786,72.17 27.18,71.776 27.18,71.36 ; 24.44,71.789 ccw(c24.44,72.705) 25.088,72.058 ; 24.45,12.18 24.45,12.84 ; 24.45,68.18 24.45,68.84 ; 24.644,12.381 cw(c25.09,12.84) 24.45,12.84 ; 24.644,68.381 cw(c25.09,68.84) 24.45,68.84 ; 24.719,15.51 cw(c25.153,15.51) 24.846,15.816 ; 24.719,71.51 cw(c25.153,71.51) 24.846,71.816 ; v1(24.79,19.37) 24.835,19.325 27.04,19.325 27.512,18.854 28.48,18.854 30.83,16.503 30.83,14.71 ; v1(24.79,75.37) 24.835,75.325 27.04,75.325 27.512,74.854 28.48,74.854 30.83,72.503 30.83,70.71 ; 24.82,40.64 24.82,40.224 25.214,39.83 26.8,39.83 27.56,40.59 ; 24.82,96.64 24.82,96.224 25.214,95.83 26.8,95.83 27.56,96.59 ; 24.833,40.405 ccw(c25.302,40.405) 24.971,40.073 ; 24.833,96.405 ccw(c25.302,96.405) 24.971,96.073 ; v1@24.86,19.44 ccw(c25.136,19.716) 25.136,19.325 ; v1@24.86,75.44 ccw(c25.136,75.716) 25.136,75.325 ; v1@25.18,14.01 ccw(c25.012,14.178) 25.25,14.178 ccw(c25.488,14.178) v1@25.32,14.01 ; v1@25.18,70.01 ccw(c25.012,70.178) 25.25,70.178 ccw(c25.488,70.178) v1@25.32,70.01 ; v1@25.195,12.564 cw(c25.545,12.219) 25.545,12.71 ; v1@25.195,68.564 cw(c25.545,68.219) 25.545,68.71 ; v1@25.2,12.42 cw(c25.057,12.277) 25.26,12.277 ; v1@25.2,68.42 cw(c25.057,68.277) 25.26,68.277 ; v1@25.24,38.41 ccw(c25.072,38.242) 25.072,38.48 ccw(c25.072,38.718) v1@25.24,38.55 ; v1@25.24,94.41 ccw(c25.072,94.242) 25.072,94.48 ccw(c25.072,94.718) v1@25.24,94.55 ; v1(25.25,13.94) 25.25,14.55 25.41,14.71 26.03,14.71 ; v1(25.25,69.94) 25.25,70.55 25.41,70.71 26.03,70.71 ; 25.26,12.228 cw(c25.532,12.228) v1@25.34,12.42 ; v1@25.26,12.49 25.26,11.59 25.11,11.44 23.11,11.44 ; v1@25.26,12.53 25.44,12.71 26.03,12.71 ccw(c26.03,11.742) v1@25.34,12.421 ; 25.26,68.228 cw(c25.532,68.228) v1@25.34,68.42 ; v1@25.26,68.49 25.26,67.59 25.11,67.44 23.11,67.44 ; v1@25.26,68.53 25.44,68.71 26.03,68.71 ccw(c26.03,67.742) v1@25.34,68.421 ; v1@25.366,12.512 cw(c25.545,12.555) 25.415,12.685 ; v1@25.366,68.512 cw(c25.545,68.555) 25.415,68.685 ; v1(25.43,17.94) 25.92,17.94 26.005,18.025 28.159,18.025 29.68,16.504 29.68,15.36 ; v1(25.43,73.94) 25.92,73.94 26.005,74.025 28.159,74.025 29.68,72.504 29.68,71.36 ; v1@25.5,17.87 cw(c25.668,17.702) 25.668,17.94 cw(c25.668,18.178) v1@25.5,18.01 ; v1@25.5,73.87 cw(c25.668,73.702) 25.668,73.94 cw(c25.668,74.178) v1@25.5,74.01 ; v1@25.9,45.21 cw(c25.732,45.042) 25.97,45.042 cw(c26.208,45.042) v1@26.04,45.21 ; v1@25.9,101.21 cw(c25.732,101.042) 25.97,101.042 cw(c26.208,101.042) v1@26.04,101.21 ; v1@25.96,10.79 ccw(c25.792,10.958) 26.03,10.958 ccw(c26.268,10.958) v1@26.1,10.79 ; v1@25.96,66.79 ccw(c25.792,66.958) 26.03,66.958 ccw(c26.268,66.958) v1@26.1,66.79 ; 25.97,41.29 26.59,41.29 26.75,41.45 v1(26.75,42.06) ; 25.97,42.79 27.18,42.79 27.55,43.16 ; 25.97,44.79 v1(25.97,45.28) ; 25.97,97.29 26.59,97.29 26.75,97.45 v1(26.75,98.06) ; 25.97,98.79 27.18,98.79 27.55,99.16 ; 25.97,100.79 v1(25.97,101.28) ; 26,23.63 26,20.94 27.68,19.26 28.648,19.26 31.52,16.388 31.52,14.42 31.31,14.21 30.83,14.21 ; 26,79.63 26,76.94 27.68,75.26 28.648,75.26 31.52,72.388 31.52,70.42 31.31,70.21 30.83,70.21 ; v1(26.03,10.72) 26.03,11.21 ; 26.03,13.21 24.82,13.21 24.45,12.84 ; v1(26.03,66.72) 26.03,67.21 ; 26.03,69.21 24.82,69.21 24.45,68.84 ; 26.455,43.29 ccw(c26.455,43.781) v1@26.805,43.436 ; 26.455,99.29 ccw(c26.455,99.781) v1@26.805,99.436 ; v1@26.5,37.99 ccw(c26.332,37.822) 26.332,38.06 ccw(c26.332,38.298) v1@26.5,38.13 ; v1@26.5,93.99 ccw(c26.332,93.822) 26.332,94.06 ccw(c26.332,94.298) v1@26.5,94.13 ; 26.585,43.315 ccw(c26.455,43.445) v1@26.634,43.488 ; 26.585,99.315 ccw(c26.455,99.445) v1@26.634,99.488 ; v1@26.66,99.579 cw(c25.97,100.258) 25.97,99.29 26.56,99.29 v1@26.74,99.47 ; v1@26.66,99.58 ccw(c26.468,99.772) 26.74,99.772 ; v1@26.68,41.99 cw(c26.512,41.822) 26.75,41.822 cw(c26.988,41.822) v1@26.82,41.99 ; v1@26.68,97.99 cw(c26.512,97.822) 26.75,97.822 cw(c26.988,97.822) v1@26.82,97.99 ; v1(26.69,17.52) 27.16,17.52 27.665,17.015 28.68,16 28.68,15.36 ; v1(26.69,73.52) 27.16,73.52 27.665,73.015 28.68,72 28.68,71.36 ; v1@26.74,43.47 26.56,43.29 25.97,43.29 ccw(c25.97,44.258) 26.66,43.579 ccw(c26.468,43.772) 26.74,43.772 ; v1@26.74,43.51 26.74,44.41 26.89,44.56 28.89,44.56 ; 26.74,43.723 ccw(c26.943,43.723) v1@26.8,43.58 ; v1@26.74,99.51 26.74,100.41 26.89,100.56 28.89,100.56 ; 26.74,99.723 ccw(c26.943,99.723) v1@26.8,99.58 ; v1@26.76,17.45 cw(c26.928,17.282) 26.928,17.52 cw(c26.928,17.758) v1@26.76,17.59 ; v1@26.76,73.45 cw(c26.928,73.282) 26.928,73.52 cw(c26.928,73.758) v1@26.76,73.59 ; 26.864,36.675 cw(c26.864,36.284) v1@27.14,36.56 ; 26.864,92.675 cw(c26.864,92.284) v1@27.14,92.56 ; 26.912,39.942 cw(c27.56,39.295) 27.56,40.211 ; 26.912,95.942 cw(c27.56,95.295) 27.56,96.211 ; 27.029,15.927 cw(c26.698,15.595) 27.167,15.595 ; 27.029,71.927 cw(c26.698,71.595) 27.167,71.595 ; 27.154,40.184 ccw(c26.847,40.49) 27.281,40.49 ; 27.154,96.184 ccw(c26.847,96.49) 27.281,96.49 ; 27.356,43.619 cw(c26.91,43.16) 27.55,43.16 ; 27.356,99.619 cw(c26.91,99.16) 27.55,99.16 ; 27.38,8.28 29.486,8.28 ; 27.379,64.28 29.486,64.28 ; 27.55,43.82 27.55,43.16 ; 27.55,99.82 27.55,99.16 ; 27.744,43.619 ccw(c28.19,43.16) 27.55,43.16 ; 27.744,99.619 ccw(c28.19,99.16) 27.55,99.16 ; v1@27.81,37.29 ccw(c27.642,37.122) 27.642,37.36 ccw(c27.642,37.598) v1@27.81,37.43 ; v1@27.81,93.29 ccw(c27.642,93.122) 27.642,93.36 ccw(c27.642,93.598) v1@27.81,93.43 ; v1(27.88,37.36) v1@27.81,37.36 ; v1(27.88,93.36) v1@27.81,93.36 ; v1@27.89,37.28 v1@27.81,37.36 ; v1@27.89,93.28 v1@27.81,93.36 ; v1@27.95,17.422 cw(c27.95,17.184) 28.118,17.352 cw(c28.286,17.52) v1@28.048,17.52 ; v1(27.95,17.52) 29.18,16.29 29.18,15.36 ; v1@27.95,73.422 cw(c27.95,73.184) 28.118,73.352 cw(c28.286,73.52) v1@28.048,73.52 ; v1(27.95,73.52) 29.18,72.29 29.18,71.36 ; 28.006,8.523 ccw(c28.593,9.111) 28.593,8.28 ; 28.006,64.523 ccw(c28.593,65.111) 28.593,64.28 ; 28.15,8.667 ccw(c29.084,9.602) 29.084,8.28 ; 28.15,64.667 ccw(c29.084,65.602) 29.084,64.28 ; 28.54,19.732 cw(c28.54,18.673) 29.288,19.422 ; 28.54,20.17 30.79,17.92 v1(31.45,17.92) ; 28.54,35.3 v1(31.31,38.07) ; 28.54,35.862 ccw(c28.54,37.219) 29.499,36.259 ; 28.54,36.065 ccw(c28.54,37.913) 29.846,36.606 ; 28.54,36.268 ccw(c28.54,38.606) 30.193,36.953 ; v1(28.54,36.86) 29.344,36.86 29.422,36.938 30.734,38.25 30.734,39.62 30.734,41.004 30.79,41.06 30.79,41.84 30.6,42.03 29.06,42.03 28.89,41.86 28.89,41.06 ; 28.54,75.732 cw(c28.54,74.673) 29.288,75.422 ; 28.54,76.17 30.79,73.92 v1(31.45,73.92) ; 28.54,91.3 v1(31.31,94.07) ; 28.54,91.862 ccw(c28.54,93.219) 29.499,92.259 ; 28.54,92.065 ccw(c28.54,93.913) 29.846,92.606 ; 28.54,92.268 ccw(c28.54,94.606) 30.193,92.953 ; v1(28.54,92.86) 29.344,92.86 29.422,92.938 30.734,94.25 30.734,95.62 30.734,97.004 30.79,97.06 30.79,97.84 30.6,98.03 29.06,98.03 28.89,97.86 28.89,97.06 ; v1@28.61,36.79 cw(c28.778,36.622) 28.778,36.86 cw(c28.778,37.098) v1@28.61,36.93 ; v1@28.61,92.79 cw(c28.778,92.622) 28.778,92.86 cw(c28.778,93.098) v1@28.61,92.93 ; 28.782,20.38 ccw(c29.873,20.38) 29.102,19.608 ; 28.782,76.38 ccw(c29.873,76.38) 29.102,75.608 ; 28.785,41.415 ccw(c28.532,41.668) 28.89,41.668 ccw(c29.248,41.668) 28.995,41.415 ; 28.785,44.215 ccw(c28.532,44.468) 28.89,44.468 ccw(c29.248,44.468) 28.995,44.215 ; 28.785,97.415 ccw(c28.532,97.668) 28.89,97.668 ccw(c29.248,97.668) 28.995,97.415 ; 28.785,100.215 ccw(c28.532,100.468) 28.89,100.468 ccw(c29.248,100.468) 28.995,100.215 ; 28.89,43.86 28.89,44.56 ; 28.89,44.484 cw(c29.557,44.484) 29.341,45.116 ; 28.89,44.769 cw(c29.46,44.769) 29.275,45.308 ; 28.89,45.054 cw(c29.362,45.054) 29.209,45.5 ; 28.89,99.86 28.89,100.56 ; 28.89,100.484 cw(c29.557,100.484) 29.341,101.116 ; 28.89,100.769 cw(c29.46,100.769) 29.275,101.308 ; 28.89,101.054 cw(c29.362,101.054) 29.209,101.5 ; 28.985,20.38 ccw(c30.567,20.38) 29.448,19.262 ; 28.985,76.38 ccw(c30.567,76.38) 29.448,75.262 ; v1@29.042,37.37 ccw(c28.804,37.37) 28.972,37.538 ccw(c29.14,37.706) v1@29.14,37.468 ; v1@29.042,93.37 ccw(c28.804,93.37) 28.972,93.538 ccw(c29.14,93.706) v1@29.14,93.468 ; 29.188,20.38 ccw(c31.261,20.38) 29.795,18.915 ; 29.188,35.62 cw(c29.981,35.62) 29.421,36.181 ; 29.188,76.38 ccw(c31.261,76.38) 29.795,74.915 ; 29.188,91.62 cw(c29.981,91.62) 29.421,92.181 ; 29.25,45.38 28.89,45.02 28.89,44.56 ; 29.25,101.38 28.89,101.02 28.89,100.56 ; 29.288,8.082 ccw(c28.811,7.605) 28.811,8.28 ccw(c28.811,8.955) 29.288,8.478 ; 29.288,64.082 ccw(c28.811,63.605) 28.811,64.28 ccw(c28.811,64.955) 29.288,64.478 ; 29.49,6.76 30.21,7.48 30.21,9.16 29.68,9.69 29.68,10.56 ; 29.49,7.039 ccw(c29.49,7.714) 29.967,7.237 ccw(c30.444,6.76) 29.769,6.76 ; 29.49,62.76 30.21,63.48 30.21,65.16 29.68,65.69 29.68,66.56 ; 29.49,63.039 ccw(c29.49,63.714) 29.967,63.237 ccw(c30.444,62.76) 29.769,62.76 ; 30.18,15.36 30.18,16.579 28.311,18.447 24.91,18.447 24.717,18.64 v1@24.19,18.64 ; 30.18,71.36 30.18,72.579 28.311,74.447 24.91,74.447 24.717,74.64 v1@24.19,74.64 ; 30.536,39.422 cw(c30.059,38.945) 30.734,38.945 cw(c31.409,38.945) 30.932,39.422 ; 30.536,39.818 ccw(c30.059,40.295) 30.734,40.295 ccw(c31.409,40.295) 30.932,39.818 ; 30.536,95.422 cw(c30.059,94.945) 30.734,94.945 cw(c31.409,94.945) 30.932,95.422 ; 30.536,95.818 ccw(c30.059,96.295) 30.734,96.295 ccw(c31.409,96.295) 30.932,95.818 ; 30.685,41.415 ccw(c30.432,41.668) 30.79,41.668 ccw(c31.148,41.668) 30.895,41.415 ; 30.685,97.415 ccw(c30.432,97.668) 30.79,97.668 ccw(c31.148,97.668) 30.895,97.415 ; 30.734,40.317 cw(c31.283,40.317) 30.895,40.705 ; 30.734,96.317 cw(c31.283,96.317) 30.895,96.705 ; 30.812,8.478 ccw(c30.335,8.955) 31.01,8.955 ccw(c31.685,8.955) 31.208,8.478 ; 30.812,64.478 ccw(c30.335,64.955) 31.01,64.955 ccw(c31.685,64.955) 31.208,64.478 ; 30.83,11.21 30.83,10.52 31.01,10.34 31.01,8.28 ; 30.83,12.21 v1(31.45,12.21) v1@31.52,12.21 ; 30.83,67.21 30.83,66.52 31.01,66.34 31.01,64.28 ; 30.83,68.21 v1(31.45,68.21) v1@31.52,68.21 ; v1@30.92,9.72 cw(c30.704,9.504) 31.01,9.504 ; v1@30.92,9.86 ccw(c30.704,10.076) 31.01,10.076 ; v1@30.92,65.72 cw(c30.704,65.504) 31.01,65.504 ; v1@30.92,65.86 ccw(c30.704,66.076) 31.01,66.076 ; v1@31.212,38.07 cw(c30.974,38.07) 31.142,37.902 cw(c31.31,37.734) v1@31.31,37.972 ; v1@31.212,94.07 cw(c30.974,94.07) 31.142,93.902 cw(c31.31,93.734) v1@31.31,93.972 ; v1@31.38,12.14 ccw(c31.212,11.972) 31.212,12.21 ccw(c31.212,12.448) v1@31.38,12.28 ; v1@31.38,17.85 ccw(c31.212,17.682) 31.212,17.92 ccw(c31.212,18.158) v1@31.38,17.99 ; v1@31.38,68.14 ccw(c31.212,67.972) 31.212,68.21 ccw(c31.212,68.448) v1@31.38,68.28 ; v1@31.38,73.85 ccw(c31.212,73.682) 31.212,73.92 ccw(c31.212,74.158) v1@31.38,73.99 ; v1@32.48,43.79 v1(32.55,43.79) 33.17,43.79 ; v1@32.48,99.79 v1(32.55,99.79) 33.17,99.79 ; v1(32.55,38.08) 33.21,38.08 35.46,35.83 ; v1(32.55,94.08) 33.21,94.08 35.46,91.83 ; v1@32.62,38.01 cw(c32.788,37.842) 32.788,38.08 cw(c32.788,38.318) v1@32.62,38.15 ; v1@32.62,43.72 cw(c32.788,43.552) 32.788,43.79 cw(c32.788,44.028) v1@32.62,43.86 ; v1@32.62,94.01 cw(c32.788,93.842) 32.788,94.08 cw(c32.788,94.318) v1@32.62,94.15 ; v1@32.62,99.72 cw(c32.788,99.552) 32.788,99.79 cw(c32.788,100.028) v1@32.62,99.86 ; v1(32.69,17.93) 35.46,20.7 ; v1@32.69,18.028 ccw(c32.69,18.266) 32.858,18.098 ccw(c33.026,17.93) v1@32.788,17.93 ; v1(32.69,73.93) 35.46,76.7 ; v1@32.69,74.028 ccw(c32.69,74.266) 32.858,74.098 ccw(c33.026,73.93) v1@32.788,73.93 ; 32.792,47.522 cw(c32.315,47.045) 32.99,47.045 cw(c33.665,47.045) 33.188,47.522 ; 32.792,103.522 cw(c32.315,103.045) 32.99,103.045 cw(c33.665,103.045) 33.188,103.522 ; 32.99,45.924 cw(c33.296,45.924) v1@33.08,46.14 ; 32.99,46.496 ccw(c33.296,46.496) v1@33.08,46.28 ; 32.99,47.72 32.99,45.66 33.17,45.48 33.17,44.79 ; 32.99,101.924 cw(c33.296,101.924) v1@33.08,102.14 ; 32.99,102.496 ccw(c33.296,102.496) v1@33.08,102.28 ; 32.99,103.72 32.99,101.66 33.17,101.48 33.17,100.79 ; 33.068,16.182 cw(c32.591,15.705) 33.266,15.705 cw(c33.941,15.705) 33.464,16.182 ; 33.068,16.578 ccw(c32.591,17.055) 33.266,17.055 ccw(c33.941,17.055) 33.464,16.578 ; 33.068,72.182 cw(c32.591,71.705) 33.266,71.705 cw(c33.941,71.705) 33.464,72.182 ; 33.068,72.578 ccw(c32.591,73.055) 33.266,73.055 ccw(c33.941,73.055) 33.464,72.578 ; 33.105,14.585 cw(c32.852,14.332) 33.21,14.332 cw(c33.568,14.332) 33.315,14.585 ; 33.105,15.295 ccw(c32.717,15.683) 33.266,15.683 ; 33.105,70.585 cw(c32.852,70.332) 33.21,70.332 cw(c33.568,70.332) 33.315,70.585 ; 33.105,71.295 ccw(c32.717,71.683) 33.266,71.683 ; 33.17,41.29 33.17,39.497 35.52,37.146 36.488,37.146 36.96,36.675 39.165,36.675 v1(39.21,36.63) ; 33.17,41.79 32.69,41.79 32.48,41.58 32.48,39.612 35.352,36.74 36.32,36.74 38,35.06 38,32.37 ; 33.17,97.29 33.17,95.497 35.52,93.146 36.488,93.146 36.96,92.675 39.165,92.675 v1(39.21,92.63) ; 33.17,97.79 32.69,97.79 32.48,97.58 32.48,95.612 35.352,92.74 36.32,92.74 38,91.06 38,88.37 ; 33.807,19.047 cw(c35.46,17.394) 35.46,19.732 ; 33.807,75.047 cw(c35.46,73.394) 35.46,75.732 ; 33.82,40.64 33.82,39.421 35.689,37.553 39.09,37.553 39.283,37.36 v1@39.81,37.36 ; 33.82,96.64 33.82,95.421 35.689,93.553 39.09,93.553 39.283,93.36 v1@39.81,93.36 ; 34.154,19.394 cw(c35.46,18.087) 35.46,19.935 ; 34.154,75.394 cw(c35.46,74.087) 35.46,75.935 ; 34.205,37.085 cw(c32.739,35.62) 34.812,35.62 ; 34.205,93.085 cw(c32.739,91.62) 34.812,91.62 ; 34.231,49.24 cw(c33.556,49.24) 34.033,48.763 cw(c34.51,48.286) 34.51,48.961 ; 34.231,105.24 cw(c33.556,105.24) 34.033,104.763 cw(c34.51,104.286) 34.51,104.961 ; 34.32,40.64 34.32,39.496 35.841,37.975 37.995,37.975 38.08,38.06 v1(38.57,38.06) ; 34.32,45.44 34.32,46.31 33.79,46.84 33.79,48.52 34.51,49.24 ; 34.32,96.64 34.32,95.496 35.841,93.975 37.995,93.975 38.08,94.06 v1(38.57,94.06) ; 34.32,101.44 34.32,102.31 33.79,102.84 33.79,104.52 34.51,105.24 ; 34.501,19.741 cw(c35.46,18.781) 35.46,20.138 ; 34.501,75.741 cw(c35.46,74.781) 35.46,76.138 ; 34.514,47.72 36.62,47.72 ; 34.514,103.72 36.62,103.72 ; 34.552,36.738 cw(c33.433,35.62) 35.015,35.62 ; 34.552,92.738 cw(c33.433,91.62) 35.015,91.62 ; 34.579,19.819 ccw(c34.019,20.38) 34.812,20.38 ; 34.579,75.819 ccw(c34.019,76.38) 34.812,76.38 ; 34.659,10.884 ccw(c34.443,11.516) 35.11,11.516 ; 34.659,66.884 ccw(c34.443,67.516) 35.11,67.516 ; 34.712,36.578 ccw(c35.46,37.327) 35.46,36.268 ; 34.712,47.522 cw(c35.189,47.045) 35.189,47.72 cw(c35.189,48.395) 34.712,47.918 ; 34.712,92.578 ccw(c35.46,93.327) 35.46,92.268 ; 34.712,103.522 cw(c35.189,103.045) 35.189,103.72 cw(c35.189,104.395) 34.712,103.918 ; 34.725,10.692 ccw(c34.54,11.231) 35.11,11.231 ; 34.725,66.692 ccw(c34.54,67.231) 35.11,67.231 ; 34.75,10.62 35.11,10.98 35.11,11.44 ; 34.75,66.62 35.11,66.98 35.11,67.44 ; 34.791,10.5 ccw(c34.638,10.946) 35.11,10.946 ; 34.791,66.5 ccw(c34.638,66.946) 35.11,66.946 ; 34.82,40.64 34.82,39.71 v1(36.05,38.48) ; 34.82,96.64 34.82,95.71 v1(36.05,94.48) ; v1@34.86,18.532 cw(c34.86,18.294) 35.028,18.462 cw(c35.196,18.63) v1@34.958,18.63 ; v1(34.86,18.63) 36.07,17.42 38.076,17.42 38.481,17.015 39.09,17.015 40.18,15.925 40.18,15.36 ; v1@34.86,74.532 cw(c34.86,74.294) 35.028,74.462 cw(c35.196,74.63) v1@34.958,74.63 ; v1(34.86,74.63) 36.07,73.42 38.076,73.42 38.481,73.015 39.09,73.015 40.18,71.925 40.18,71.36 ; 34.898,36.392 cw(c34.127,35.62) 35.218,35.62 ; 34.898,92.392 cw(c34.127,91.62) 35.218,91.62 ; 34.916,47.72 cw(c34.916,46.398) 35.85,47.333 ; 34.916,103.72 cw(c34.916,102.398) 35.85,103.333 ; 35.005,11.785 cw(c34.752,11.532) 35.11,11.532 cw(c35.468,11.532) 35.215,11.785 ; 35.005,14.585 cw(c34.752,14.332) 35.11,14.332 cw(c35.468,14.332) 35.215,14.585 ; 35.005,67.785 cw(c34.752,67.532) 35.11,67.532 cw(c35.468,67.532) 35.215,67.785 ; 35.005,70.585 cw(c34.752,70.332) 35.11,70.332 cw(c35.468,70.332) 35.215,70.585 ; 35.11,12.14 35.11,11.44 ; 35.11,14.94 35.11,14.14 34.94,13.97 33.4,13.97 33.21,14.16 33.21,14.94 33.266,14.996 33.266,16.38 33.266,17.75 34.578,19.062 34.656,19.14 v1(35.46,19.14) ; 35.11,68.14 35.11,67.44 ; 35.11,70.94 35.11,70.14 34.94,69.97 33.4,69.97 33.21,70.16 33.21,70.94 33.266,70.996 33.266,72.38 33.266,73.75 34.578,75.062 34.656,75.14 v1(35.46,75.14) ; 35.32,40.64 35.32,40 36.335,38.985 36.84,38.48 v1(37.31,38.48) ; 35.32,96.64 35.32,96 36.335,94.985 36.84,94.48 v1(37.31,94.48) ; v1@35.39,19.07 ccw(c35.222,18.902) 35.222,19.14 ccw(c35.222,19.378) v1@35.39,19.21 ; v1@35.39,75.07 ccw(c35.222,74.902) 35.222,75.14 ccw(c35.222,75.378) v1@35.39,75.21 ; 35.407,47.72 cw(c35.407,46.889) 35.994,47.477 ; 35.407,103.72 cw(c35.407,102.889) 35.994,103.477 ; 35.82,40.64 35.82,40.075 36.91,38.985 37.519,38.985 37.924,38.58 39.93,38.58 v1(41.14,37.37) ; 35.82,96.64 35.82,96.075 36.91,94.985 37.519,94.985 37.924,94.58 39.93,94.58 v1(41.14,93.37) ; v1@35.952,38.48 ccw(c35.714,38.48) 35.882,38.648 ccw(c36.05,38.816) v1@36.05,38.578 ; v1@35.952,94.48 ccw(c35.714,94.48) 35.882,94.648 ccw(c36.05,94.816) v1@36.05,94.578 ; v1@36.11,18.72 v1@36.19,18.64 ; v1@36.11,74.72 v1@36.19,74.64 ; v1(36.12,18.64) v1@36.19,18.64 ; v1(36.12,74.64) v1@36.19,74.64 ; v1@36.19,18.57 cw(c36.358,18.402) 36.358,18.64 cw(c36.358,18.878) v1@36.19,18.71 ; v1@36.19,74.57 cw(c36.358,74.402) 36.358,74.64 cw(c36.358,74.878) v1@36.19,74.71 ; 36.256,12.381 ccw(c35.81,12.84) 36.45,12.84 ; 36.256,68.381 ccw(c35.81,68.84) 36.45,68.84 ; 36.44,15.41 37.2,16.17 38.786,16.17 39.18,15.776 39.18,15.36 ; 36.44,15.789 ccw(c36.44,16.705) 37.088,16.058 ; 36.44,71.41 37.2,72.17 38.786,72.17 39.18,71.776 39.18,71.36 ; 36.44,71.789 ccw(c36.44,72.705) 37.088,72.058 ; 36.45,12.18 36.45,12.84 ; 36.45,68.18 36.45,68.84 ; 36.644,12.381 cw(c37.09,12.84) 36.45,12.84 ; 36.644,68.381 cw(c37.09,68.84) 36.45,68.84 ; 36.719,15.51 cw(c37.153,15.51) 36.846,15.816 ; 36.719,71.51 cw(c37.153,71.51) 36.846,71.816 ; v1(36.79,19.37) 36.835,19.325 39.04,19.325 39.512,18.854 40.48,18.854 42.83,16.503 42.83,14.71 ; v1(36.79,75.37) 36.835,75.325 39.04,75.325 39.512,74.854 40.48,74.854 42.83,72.503 42.83,70.71 ; 36.82,40.64 36.82,40.224 37.214,39.83 38.8,39.83 39.56,40.59 ; 36.82,96.64 36.82,96.224 37.214,95.83 38.8,95.83 39.56,96.59 ; 36.833,40.405 ccw(c37.302,40.405) 36.971,40.073 ; 36.833,96.405 ccw(c37.302,96.405) 36.971,96.073 ; v1@36.86,19.44 ccw(c37.136,19.716) 37.136,19.325 ; v1@36.86,75.44 ccw(c37.136,75.716) 37.136,75.325 ; v1@37.18,14.01 ccw(c37.012,14.178) 37.25,14.178 ccw(c37.488,14.178) v1@37.32,14.01 ; v1@37.18,70.01 ccw(c37.012,70.178) 37.25,70.178 ccw(c37.488,70.178) v1@37.32,70.01 ; v1@37.195,12.564 cw(c37.545,12.219) 37.545,12.71 ; v1@37.195,68.564 cw(c37.545,68.219) 37.545,68.71 ; v1@37.2,12.42 cw(c37.057,12.277) 37.26,12.277 ; v1@37.2,68.42 cw(c37.057,68.277) 37.26,68.277 ; v1@37.24,38.41 ccw(c37.072,38.242) 37.072,38.48 ccw(c37.072,38.718) v1@37.24,38.55 ; v1@37.24,94.41 ccw(c37.072,94.242) 37.072,94.48 ccw(c37.072,94.718) v1@37.24,94.55 ; v1(37.25,13.94) 37.25,14.55 37.41,14.71 38.03,14.71 ; v1(37.25,69.94) 37.25,70.55 37.41,70.71 38.03,70.71 ; 37.26,12.228 cw(c37.532,12.228) v1@37.34,12.42 ; v1@37.26,12.49 37.26,11.59 37.11,11.44 35.11,11.44 ; v1@37.26,12.53 37.44,12.71 38.03,12.71 ccw(c38.03,11.742) v1@37.34,12.421 ; 37.26,68.228 cw(c37.532,68.228) v1@37.34,68.42 ; v1@37.26,68.49 37.26,67.59 37.11,67.44 35.11,67.44 ; v1@37.26,68.53 37.44,68.71 38.03,68.71 ccw(c38.03,67.742) v1@37.34,68.421 ; v1@37.366,12.512 cw(c37.545,12.555) 37.415,12.685 ; v1@37.366,68.512 cw(c37.545,68.555) 37.415,68.685 ; v1(37.43,17.94) 37.92,17.94 38.005,18.025 40.159,18.025 41.68,16.504 41.68,15.36 ; v1(37.43,73.94) 37.92,73.94 38.005,74.025 40.159,74.025 41.68,72.504 41.68,71.36 ; v1@37.5,17.87 cw(c37.668,17.702) 37.668,17.94 cw(c37.668,18.178) v1@37.5,18.01 ; v1@37.5,73.87 cw(c37.668,73.702) 37.668,73.94 cw(c37.668,74.178) v1@37.5,74.01 ; v1@37.9,45.21 cw(c37.732,45.042) 37.97,45.042 cw(c38.208,45.042) v1@38.04,45.21 ; v1@37.9,101.21 cw(c37.732,101.042) 37.97,101.042 cw(c38.208,101.042) v1@38.04,101.21 ; v1@37.96,10.79 ccw(c37.792,10.958) 38.03,10.958 ccw(c38.268,10.958) v1@38.1,10.79 ; v1@37.96,66.79 ccw(c37.792,66.958) 38.03,66.958 ccw(c38.268,66.958) v1@38.1,66.79 ; 37.97,41.29 38.59,41.29 38.75,41.45 v1(38.75,42.06) ; 37.97,42.79 39.18,42.79 39.55,43.16 ; 37.97,44.79 v1(37.97,45.28) ; 37.97,97.29 38.59,97.29 38.75,97.45 v1(38.75,98.06) ; 37.97,98.79 39.18,98.79 39.55,99.16 ; 37.97,100.79 v1(37.97,101.28) ; 38,23.63 38,20.94 39.68,19.26 40.648,19.26 43.52,16.388 43.52,14.42 43.31,14.21 42.83,14.21 ; 38,79.63 38,76.94 39.68,75.26 40.648,75.26 43.52,72.388 43.52,70.42 43.31,70.21 42.83,70.21 ; v1(38.03,10.72) 38.03,11.21 ; 38.03,13.21 36.82,13.21 36.45,12.84 ; v1(38.03,66.72) 38.03,67.21 ; 38.03,69.21 36.82,69.21 36.45,68.84 ; 38.455,43.29 ccw(c38.455,43.781) v1@38.805,43.436 ; 38.455,99.29 ccw(c38.455,99.781) v1@38.805,99.436 ; v1@38.5,37.99 ccw(c38.332,37.822) 38.332,38.06 ccw(c38.332,38.298) v1@38.5,38.13 ; v1@38.5,93.99 ccw(c38.332,93.822) 38.332,94.06 ccw(c38.332,94.298) v1@38.5,94.13 ; 38.585,43.315 ccw(c38.455,43.445) v1@38.634,43.488 ; 38.585,99.315 ccw(c38.455,99.445) v1@38.634,99.488 ; v1@38.66,99.579 cw(c37.97,100.258) 37.97,99.29 38.56,99.29 v1@38.74,99.47 ; v1@38.66,99.58 ccw(c38.468,99.772) 38.74,99.772 ; v1@38.68,41.99 cw(c38.512,41.822) 38.75,41.822 cw(c38.988,41.822) v1@38.82,41.99 ; v1@38.68,97.99 cw(c38.512,97.822) 38.75,97.822 cw(c38.988,97.822) v1@38.82,97.99 ; v1(38.69,17.52) 39.16,17.52 39.665,17.015 40.68,16 40.68,15.36 ; v1(38.69,73.52) 39.16,73.52 39.665,73.015 40.68,72 40.68,71.36 ; v1@38.74,43.47 38.56,43.29 37.97,43.29 ccw(c37.97,44.258) 38.66,43.579 ccw(c38.468,43.772) 38.74,43.772 ; v1@38.74,43.51 38.74,44.41 38.89,44.56 40.89,44.56 ; 38.74,43.723 ccw(c38.943,43.723) v1@38.8,43.58 ; v1@38.74,99.51 38.74,100.41 38.89,100.56 40.89,100.56 ; 38.74,99.723 ccw(c38.943,99.723) v1@38.8,99.58 ; v1@38.76,17.45 cw(c38.928,17.282) 38.928,17.52 cw(c38.928,17.758) v1@38.76,17.59 ; v1@38.76,73.45 cw(c38.928,73.282) 38.928,73.52 cw(c38.928,73.758) v1@38.76,73.59 ; 38.864,36.675 cw(c38.864,36.284) v1@39.14,36.56 ; 38.864,92.675 cw(c38.864,92.284) v1@39.14,92.56 ; 38.912,39.942 cw(c39.56,39.295) 39.56,40.211 ; 38.912,95.942 cw(c39.56,95.295) 39.56,96.211 ; 39.029,15.927 cw(c38.698,15.595) 39.167,15.595 ; 39.029,71.927 cw(c38.698,71.595) 39.167,71.595 ; 39.154,40.184 ccw(c38.847,40.49) 39.281,40.49 ; 39.154,96.184 ccw(c38.847,96.49) 39.281,96.49 ; 39.356,43.619 cw(c38.91,43.16) 39.55,43.16 ; 39.356,99.619 cw(c38.91,99.16) 39.55,99.16 ; 39.38,8.28 41.486,8.28 ; 39.379,64.28 41.486,64.28 ; 39.55,43.82 39.55,43.16 ; 39.55,99.82 39.55,99.16 ; 39.744,43.619 ccw(c40.19,43.16) 39.55,43.16 ; 39.744,99.619 ccw(c40.19,99.16) 39.55,99.16 ; v1@39.81,37.29 ccw(c39.642,37.122) 39.642,37.36 ccw(c39.642,37.598) v1@39.81,37.43 ; v1@39.81,93.29 ccw(c39.642,93.122) 39.642,93.36 ccw(c39.642,93.598) v1@39.81,93.43 ; v1(39.88,37.36) v1@39.81,37.36 ; v1(39.88,93.36) v1@39.81,93.36 ; v1@39.89,37.28 v1@39.81,37.36 ; v1@39.89,93.28 v1@39.81,93.36 ; v1@39.95,17.422 cw(c39.95,17.184) 40.118,17.352 cw(c40.286,17.52) v1@40.048,17.52 ; v1(39.95,17.52) 41.18,16.29 41.18,15.36 ; v1@39.95,73.422 cw(c39.95,73.184) 40.118,73.352 cw(c40.286,73.52) v1@40.048,73.52 ; v1(39.95,73.52) 41.18,72.29 41.18,71.36 ; 40.006,8.523 ccw(c40.593,9.111) 40.593,8.28 ; 40.006,64.523 ccw(c40.593,65.111) 40.593,64.28 ; 40.15,8.667 ccw(c41.084,9.602) 41.084,8.28 ; 40.15,64.667 ccw(c41.084,65.602) 41.084,64.28 ; 40.54,19.732 cw(c40.54,18.673) 41.288,19.422 ; 40.54,20.17 42.79,17.92 v1(43.45,17.92) ; 40.54,35.3 v1(43.31,38.07) ; 40.54,35.862 ccw(c40.54,37.219) 41.499,36.259 ; 40.54,36.065 ccw(c40.54,37.913) 41.846,36.606 ; 40.54,36.268 ccw(c40.54,38.606) 42.193,36.953 ; v1(40.54,36.86) 41.344,36.86 41.422,36.938 42.734,38.25 42.734,39.62 42.734,41.004 42.79,41.06 42.79,41.84 42.6,42.03 41.06,42.03 40.89,41.86 40.89,41.06 ; 40.54,75.732 cw(c40.54,74.673) 41.288,75.422 ; 40.54,76.17 42.79,73.92 v1(43.45,73.92) ; 40.54,91.3 v1(43.31,94.07) ; 40.54,91.862 ccw(c40.54,93.219) 41.499,92.259 ; 40.54,92.065 ccw(c40.54,93.913) 41.846,92.606 ; 40.54,92.268 ccw(c40.54,94.606) 42.193,92.953 ; v1(40.54,92.86) 41.344,92.86 41.422,92.938 42.734,94.25 42.734,95.62 42.734,97.004 42.79,97.06 42.79,97.84 42.6,98.03 41.06,98.03 40.89,97.86 40.89,97.06 ; v1@40.61,36.79 cw(c40.778,36.622) 40.778,36.86 cw(c40.778,37.098) v1@40.61,36.93 ; v1@40.61,92.79 cw(c40.778,92.622) 40.778,92.86 cw(c40.778,93.098) v1@40.61,92.93 ; 40.782,20.38 ccw(c41.873,20.38) 41.102,19.608 ; 40.782,76.38 ccw(c41.873,76.38) 41.102,75.608 ; 40.785,41.415 ccw(c40.532,41.668) 40.89,41.668 ccw(c41.248,41.668) 40.995,41.415 ; 40.785,44.215 ccw(c40.532,44.468) 40.89,44.468 ccw(c41.248,44.468) 40.995,44.215 ; 40.785,97.415 ccw(c40.532,97.668) 40.89,97.668 ccw(c41.248,97.668) 40.995,97.415